# Altium PCB Capybara.PcbDoc (part 2 of 5)
Units mil, origin at the board's own origin, x right, y up, seen from the top; angles counter-clockwise.
Board outline 2270 x 2270 mil, 4 copper layers (Top Layer, GND, Signal, Bottom Layer), stack 61.8 mil thick; 394 components, 234 nets, 1155 pads, 211 vias.
Unrouted connection lines stored in the file: 4.
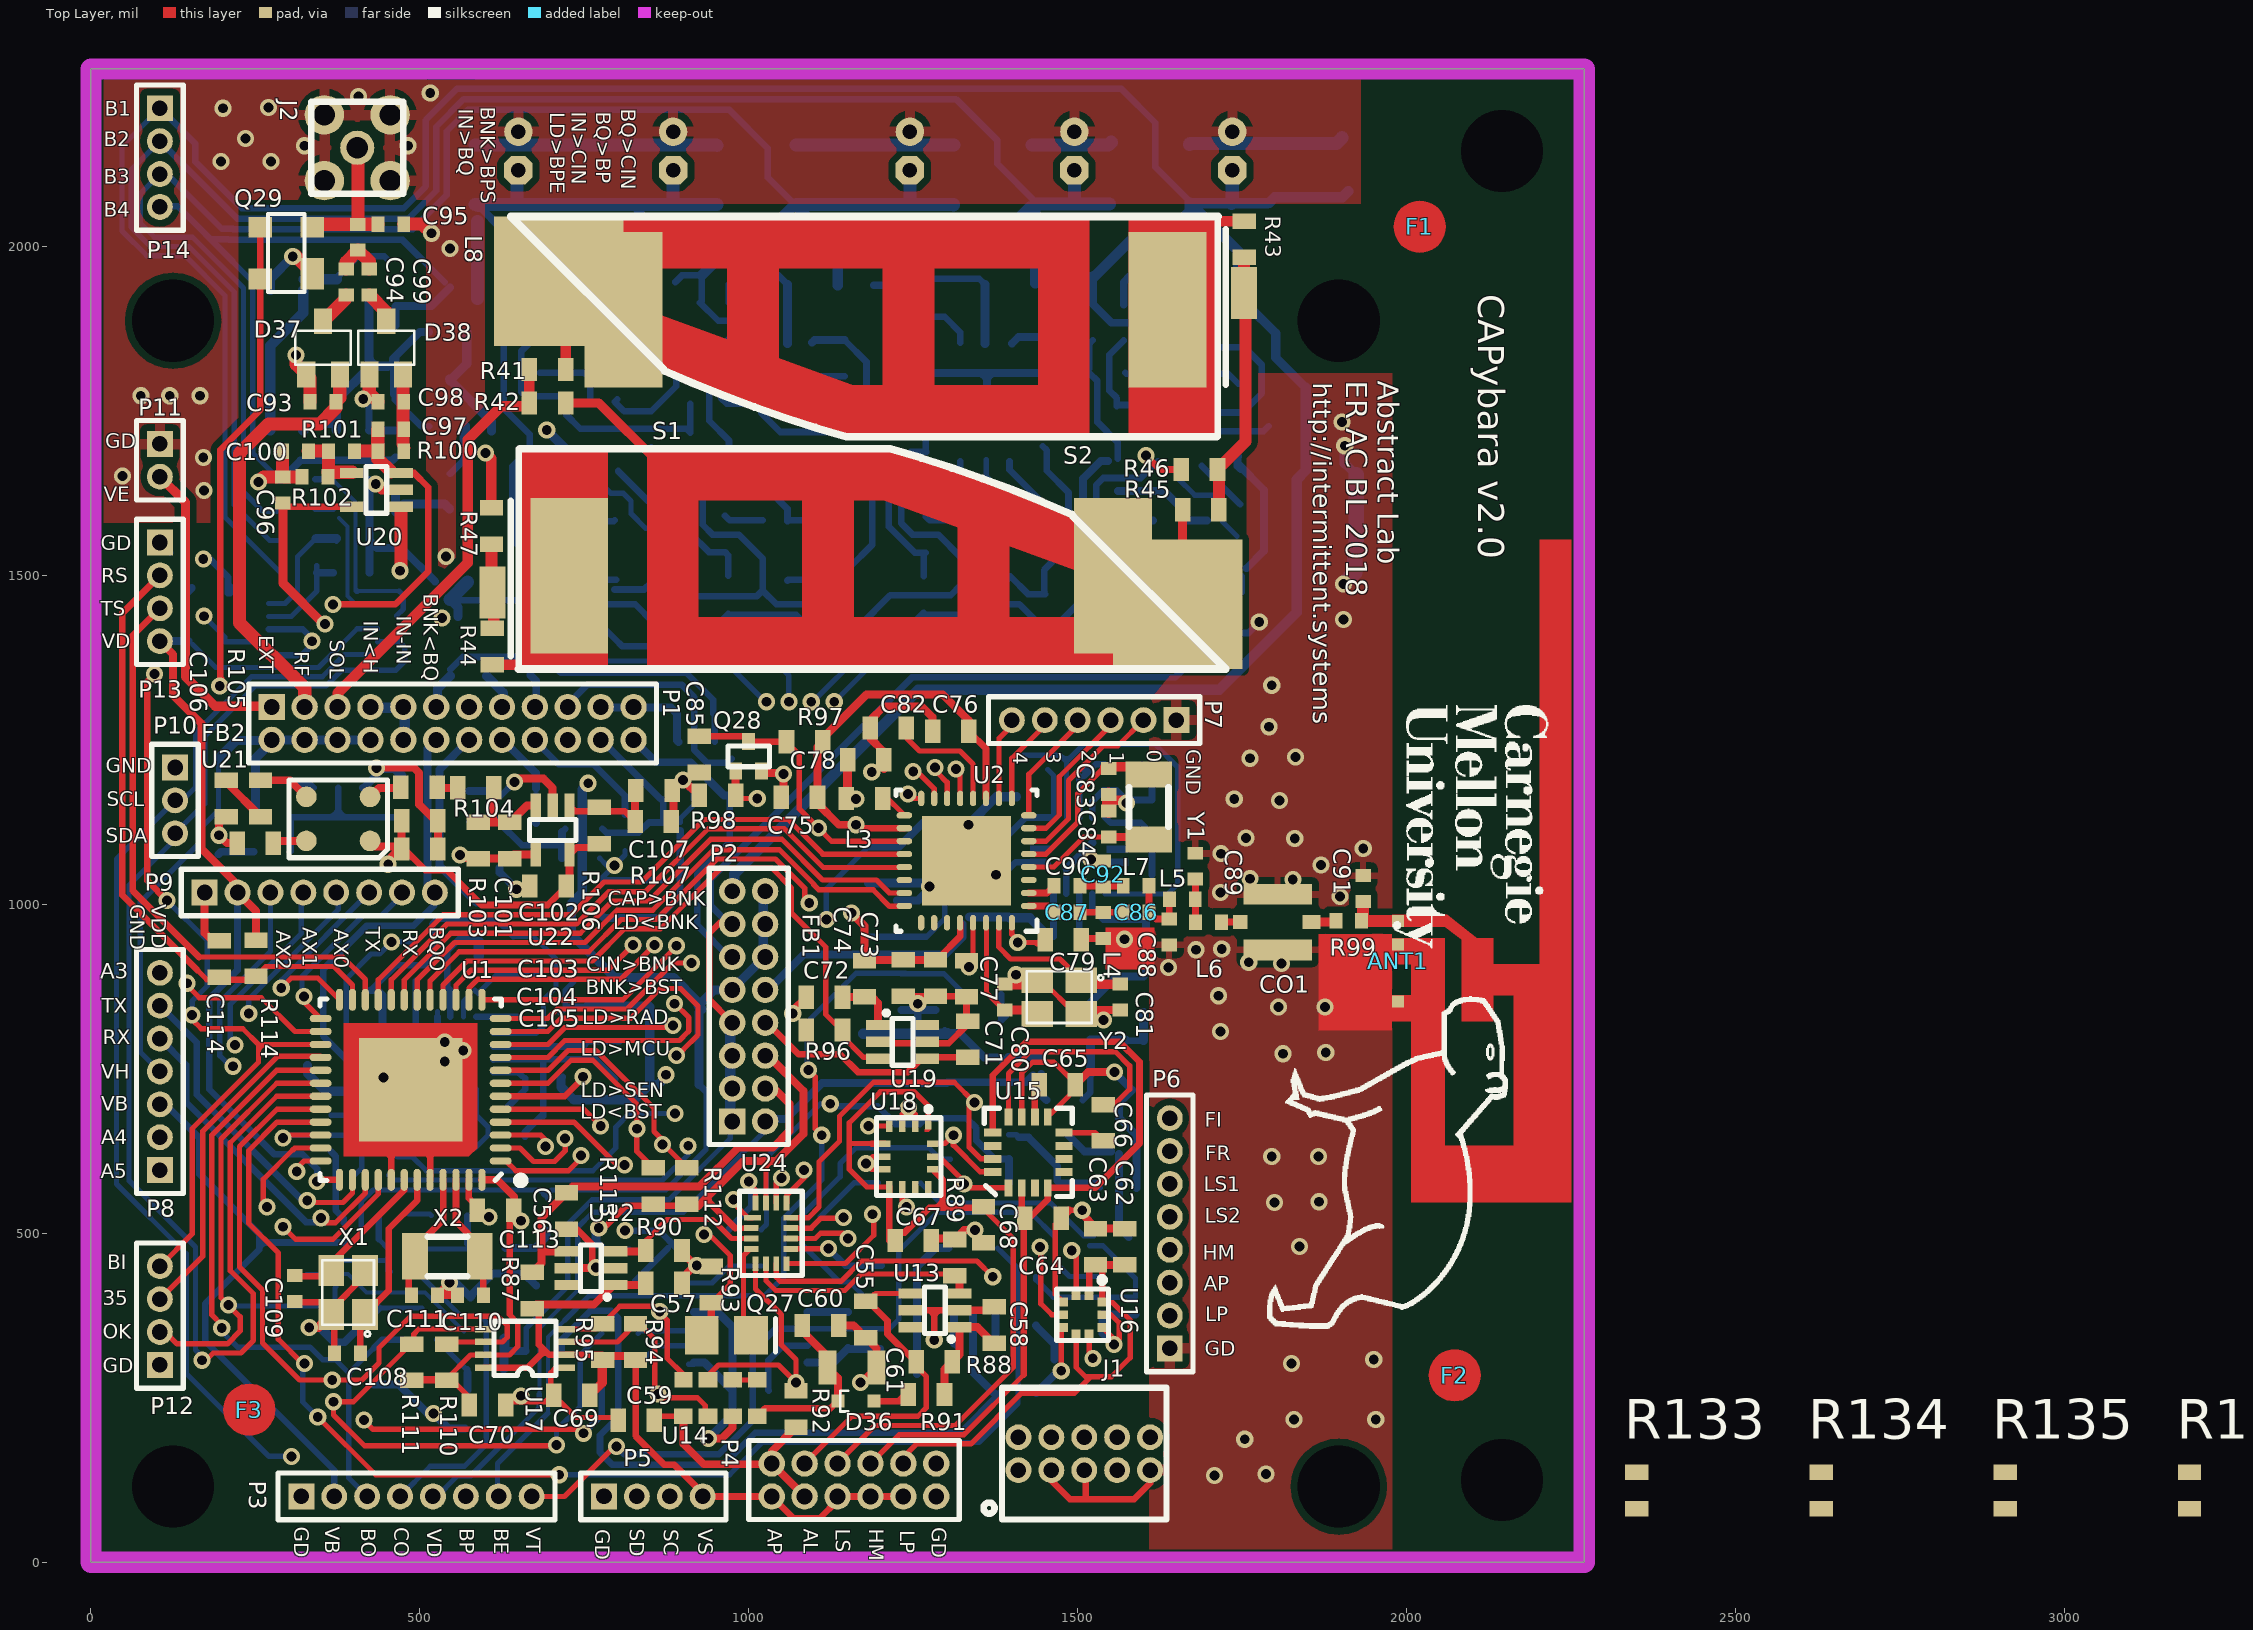
[diagram p0: Top Layer view]

## Part data (continued)
J1: library part GRPB052VWVN-RC, "Header, 50mil, 5x2, Gold, TH", Distributor Part Number=SAM8798-ND, Manufacturer="Samtec Inc.", Manufacturer Part Number=FTSH-105-01-L-D-K, ClassName=Header, ComponentLink1Description="Datasheet Link", CompType=Header, Distributor=Digikey, LatestRevisionDate=2015-08-06, MountType=TH, PackageReference="Header, 5x2, 50mil", Publisher="Texas Instruments", RoHS=Y, Supplier 1=Digi-Key, U/M=EA
J2: "MMCX RF Connector", Digi-Key Part Number=WM5552-ND, Distributor Part Number=538-73415-1001, Manufacturer=Molex, Manufacturer Part Number=0734151001, Distributor=Mouser, Mouser Part Number=538-73415-1001
L1 L2: library part Inductor, "Inductor", Distributor Part Number=994-PFL1609-472MEU, Manufacturer=Coilcraft, Manufacturer Part Number=PFL1609-472MEU, Distributor=Mouser, PackageReference=PFL1609
L3: "Inductor (Surface Mount)", Alternate Manufacturer=Digikey, Alternate PartNumber=587-2243-1-ND, Digi-Key Part Number=587-2243-1-nd, Distributor Part Number=963-LB1608T100M, Manufacturer="Taiyo Yuden", Manufacturer Part Number=LB1608T100M, Distributor=Mouser, Mouser Part Number=963-LB1608T100M
L4: "Inductor (Surface Mount)", Digi-Key Part Number=490-8389-1-ND, Manufacturer="Murata Electronics North America", Manufacturer Part Number=LQG15HS2N4S02D, Distributor=Digikey, Distributor Part Number=490-8389-1-ND, Mouser Part Number=LQG15HS2N4S02D
L5 L6: "Inductor (Surface Mount)", Distributor Part Number=490-6569-1-ND, Manufacturer="Murata Electronics North America", Manufacturer Part Number=LQG15HS2N0S02D, Distributor=Digikey
L7: "Inductor (Surface Mount)", Digi-Key Part Number=490-8389-1-ND, Manufacturer="Murata Electronics North America", Mouser Part Number=LQG15HS2N4S02D, Distributor=Digikey, Distributor Part Number=490-8389-1-ND, Manufacturer Part Number="Murata Electronics North America"
L8: "Inductor (Surface Mount)", Distributor Part Number=994-0402CS-22NXGLU, Manufacturer="Coilcraft (http://www.coilcraft.com/0402cs.cfm)", Manufacturer Part Number=0402CS-22NX_LU, Distributor=Mouser, Mouser Part Number=994-0402CS-22NXGLU
P1: Digi-Key Part Number=S9015E-12-ND, Manufacturer="Sullins Connector Solutions", Manufacturer Part Number=GRPB122VWVN-RC, Distributor=Digikey, Distributor Part Number=S9015E-12-ND